# Altium PCB AudioBanger.PcbDoc
Units mil, origin at the board's own origin, x right, y up, seen from the top; angles counter-clockwise.
Board outline 1700 x 1700 mil, 2 copper layers (Top Layer, Bottom Layer), stack 62.8 mil thick; 22 components, 21 nets, 106 pads, 11 vias.
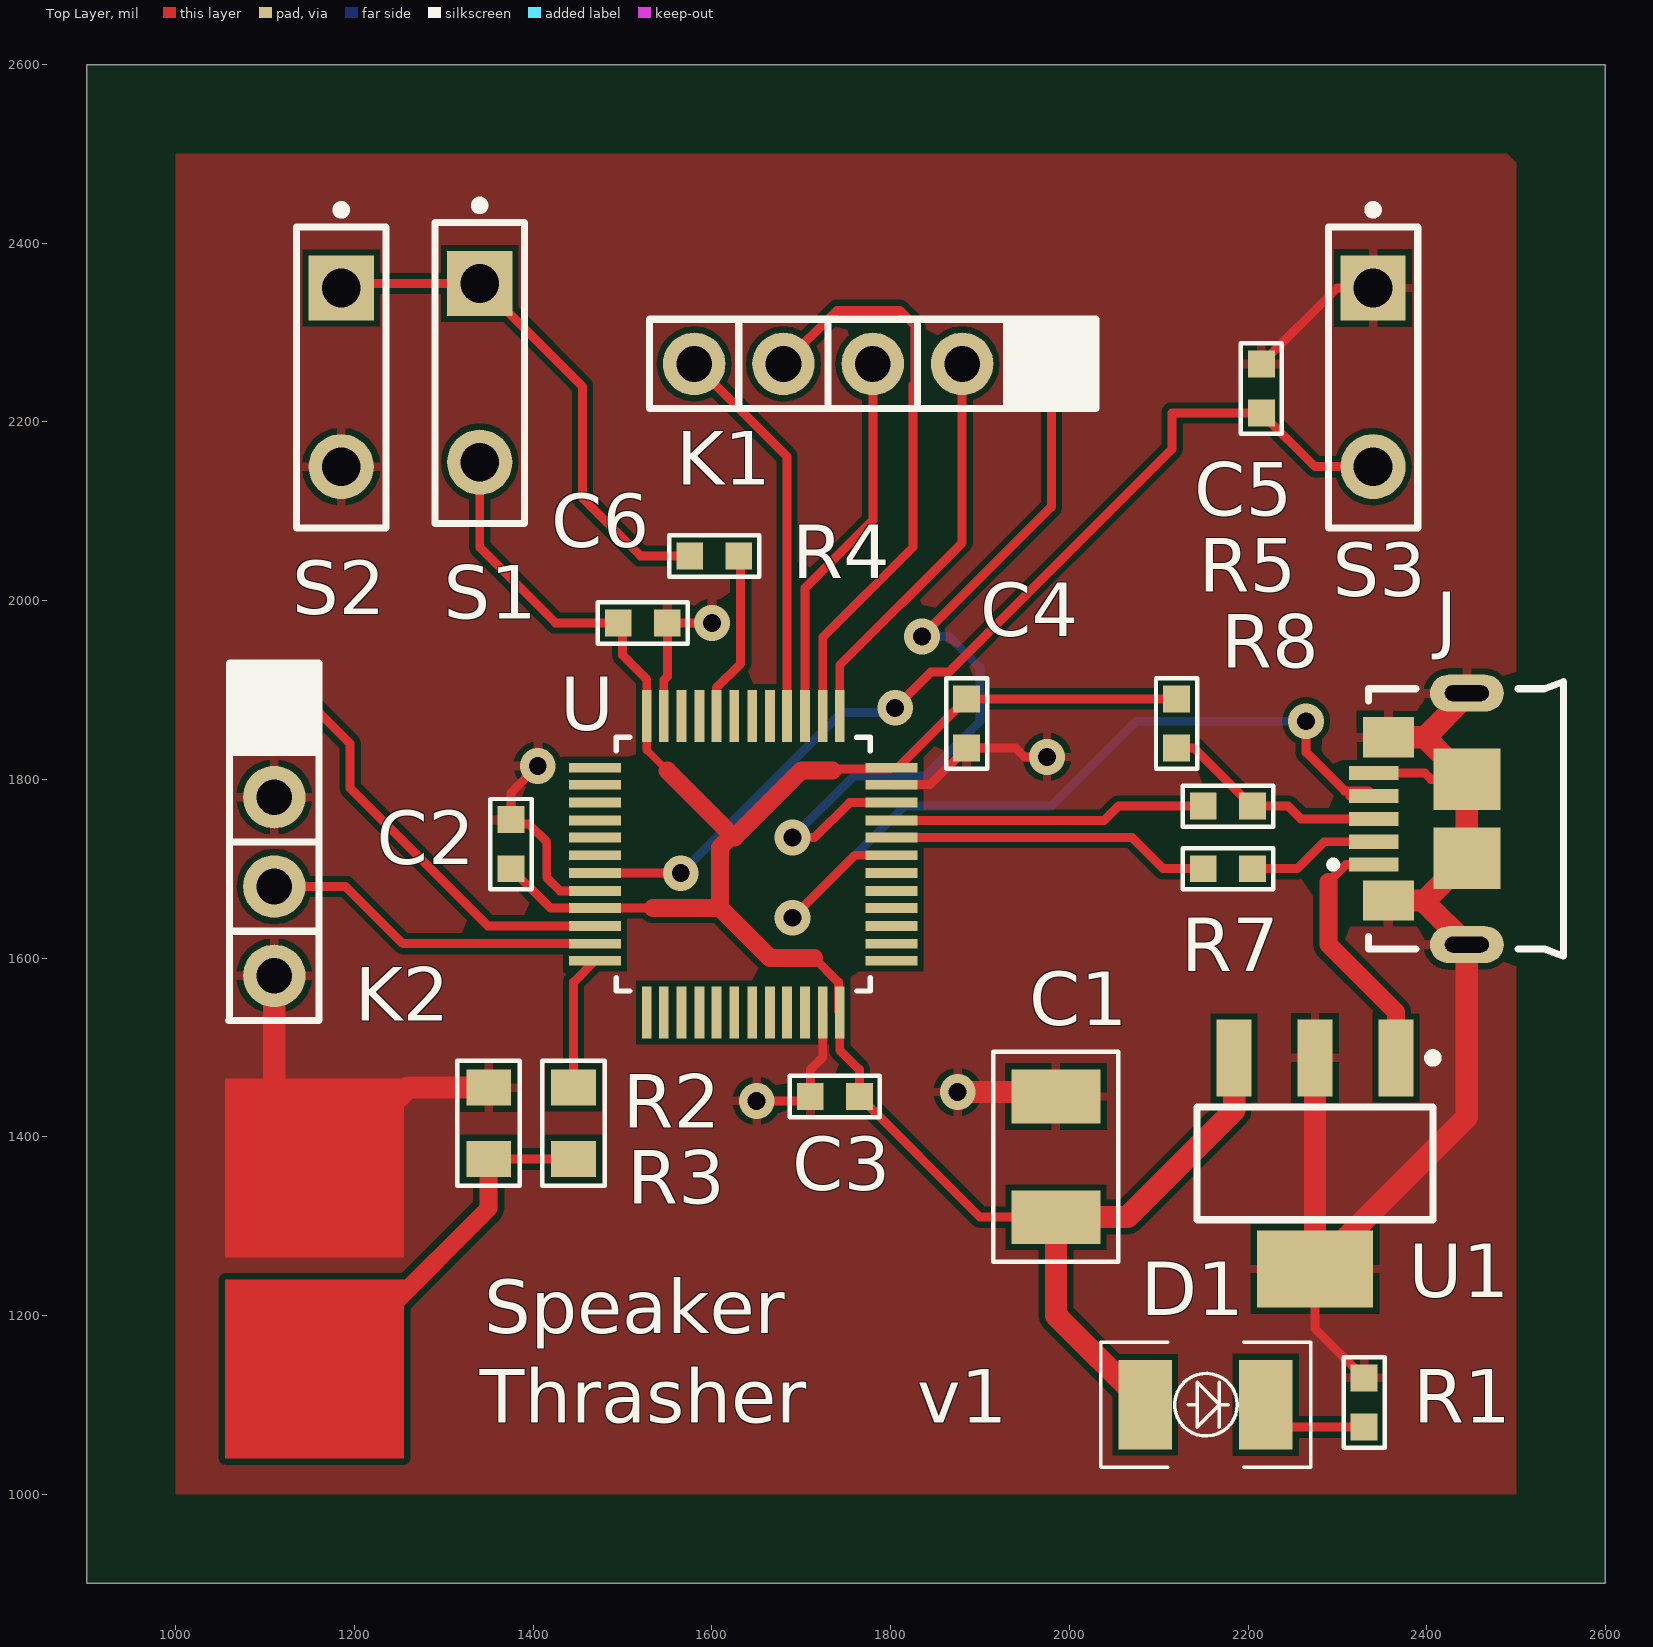
[diagram p0: Top Layer view]
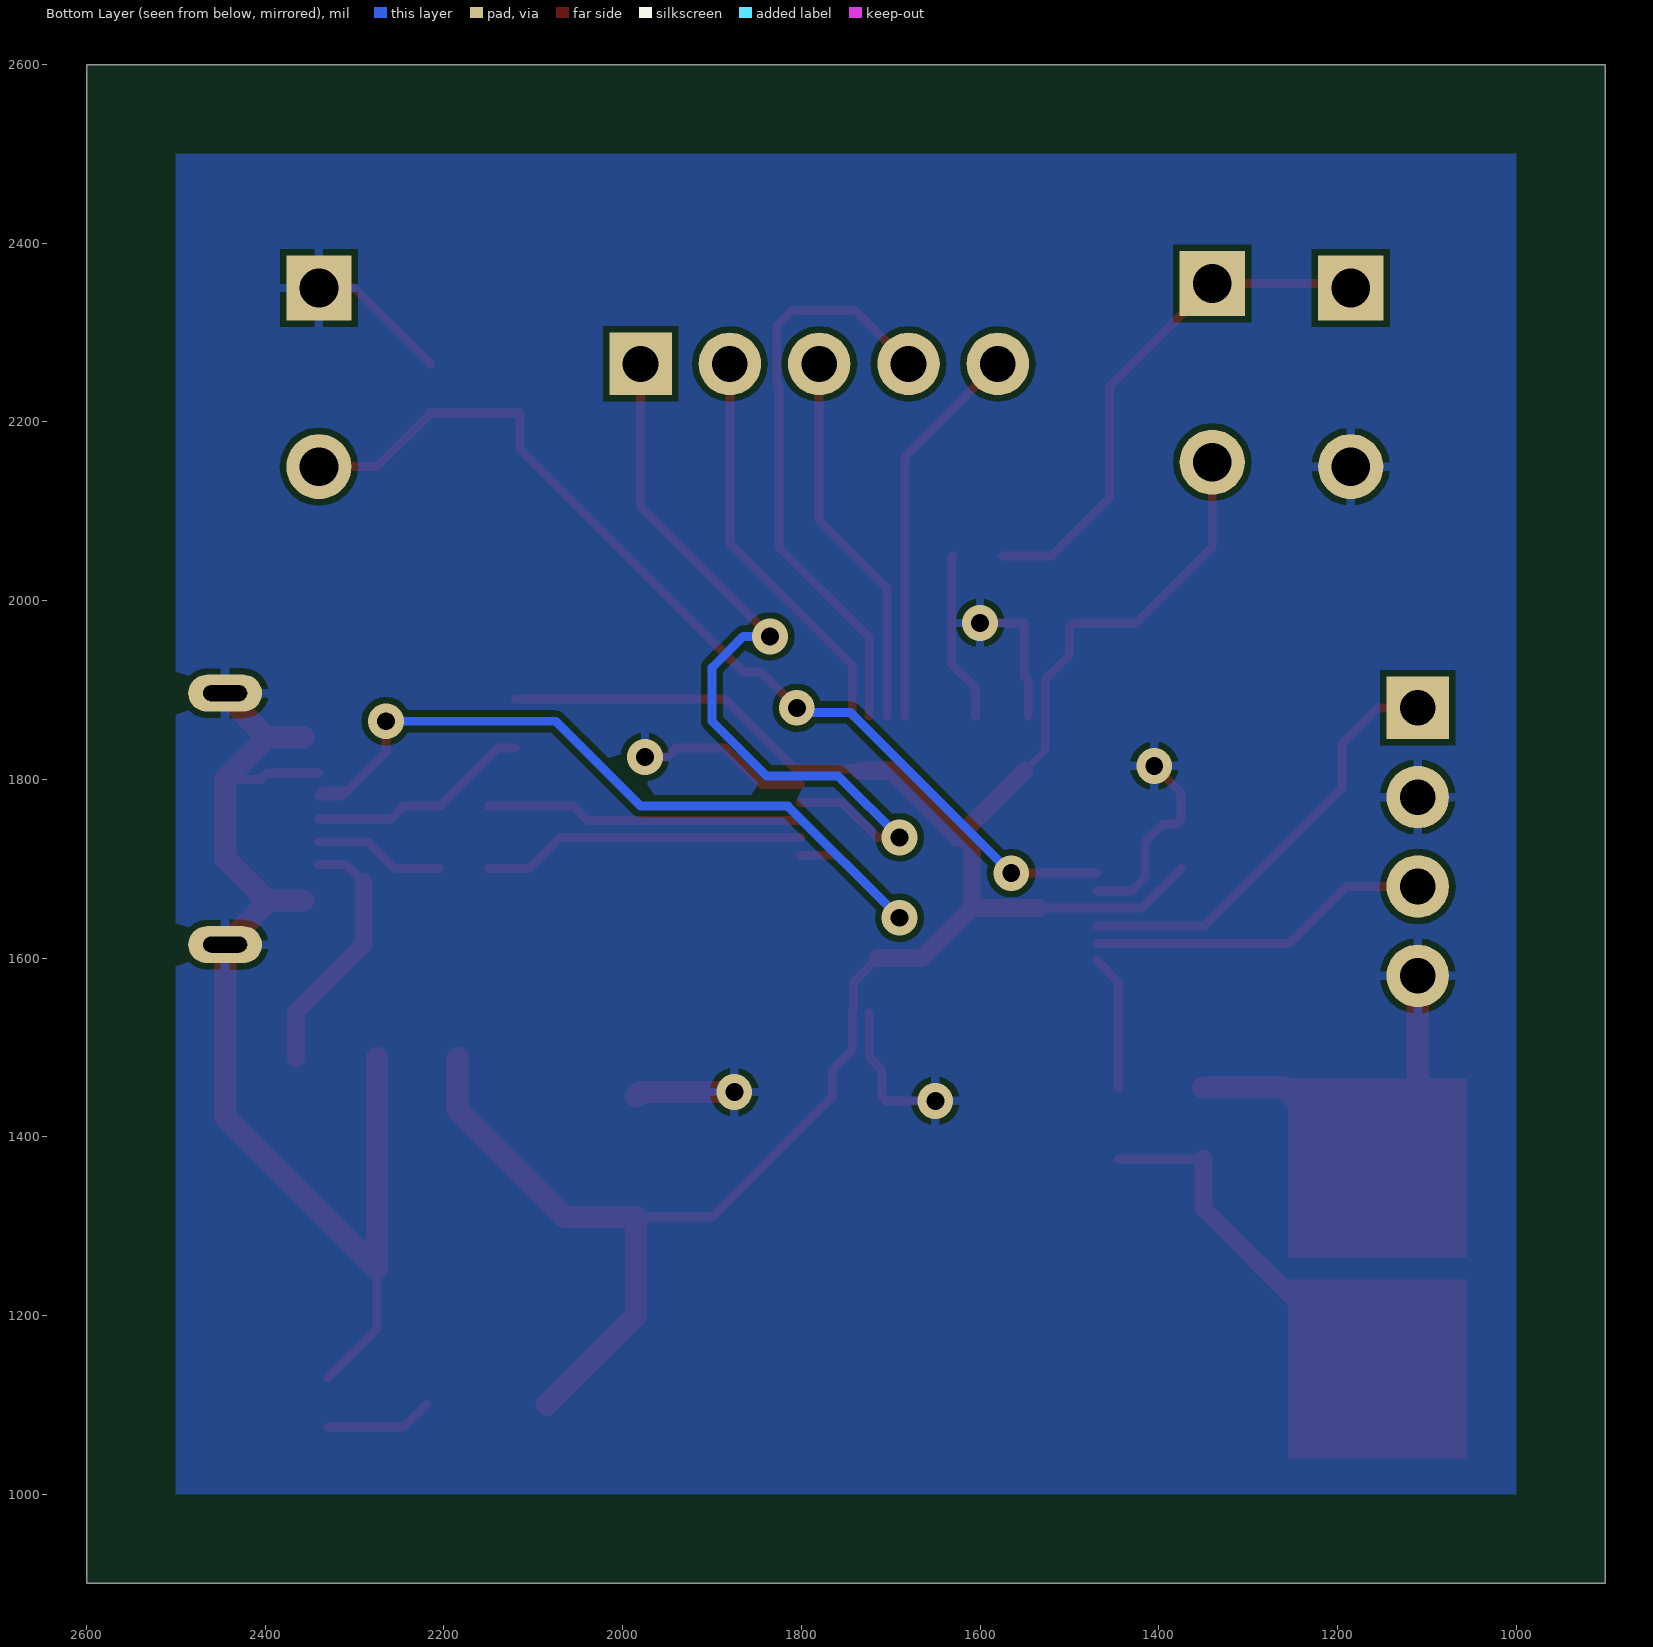
[diagram p1: Bottom Layer view, seen from below]

## Layer stack, top to bottom
Top Layer: signal copper 1.4
Dielectric: core 60, FR-4, Dk 4.8
Bottom Layer: signal copper 1.4

## Board outline
900,900 2600,900 2600,2600 900,2600 900,900

## Design rules (kind name [scope] priority, off if disabled: settings)
Clearance [All] p1: gap=7
ComponentClearance [All] p1: gap=5 collisioncheckmode=3 verticalgap=10 showdistances=FALSE
HoleSize [All] p1: absolutevalues=TRUE maxlimit=100 minlimit=10 maxpercent=80.000 minpercent=20.000
HoleToHoleClearance [All] p1: gap=5 allowstackedmicrovias=TRUE
MinimumSolderMaskSliver [All] p1: minsoldermaskwidth=1
PlaneClearance [All] p1: clearance=10
PolygonConnect [All] p1: connectstyle=Relief reliefconductorwidth=10 reliefentries=4 polygonreliefangle="90 Angle"
RoomDefinition Main [InComponentClass('Main')] p1 off: confinementstyle=ConfineIn formatcopy=TRUE lockcomponents=FALSE outline 1005,1010 2495,1010 2495,2495 1005,2495
RoutingVias [All] p1: holewidth=20 width=40 viastyle="Through Hole" minholewidth=20 minwidth=40 maxholewidth=50 maxwidth=80
SilkToSilkClearance [All] p1: silktosilkclearance=5
SilkscreenOverComponentPads [All] p1 off: minsilkscreentomaskgap=5
SolderMaskExpansion [All] p1: expansion=4
Width [All] p1: maxlimit=50 minlimit=7 preferedwidth=10
21 further rules are at their usual default settings.

## Classes and differential pairs
component class Main: J S1 S2 S3 U U1

## Components (designator, comment, footprint, x,y, rotation, side; value= is the part's Value field where it differs from the comment)
C1 "4u7" 1210C-GENERIC 1985,1310 r90 top
C2 "0603C" 0603C-GENERIC 1375,1700 r90 top
C3 "0603C" 0603C-GENERIC 1765,1445 r180 top
C4 "0603C" 0603C-GENERIC 1885,1890 r270 top
C5 "0603C" 0603C-GENERIC 2215,2210 r90 top
C6 "0603C" 0603C-GENERIC 1495,1975 r0 top
D1 "TOPLED-GREEN" TOPLED-GREEN 2085,1100 r0 top
J "USB3075-30-A" GCT_USB3075-30-A 2340.67,1704.53 r90 top
K1 "HEADER-1X5" HEADER-1X5 1980,2265 r270 top
K2 "HEADER-1X4" HEADER-1X4 1110,1880 r0 top
R1 "0603R-1K5" 0603R-1k5 2330,1075 r90 top
R2 "10R" 0805R-10 1445,1445 r270 top
R3 "10R" 0805R-10 1350,1445 r270 top
R4 "10K" 0603R-10K 1575,2050 r0 top
R5 "0603R-1K5" 0603R-1k5 2120,1890 r270 top
R7 "22R" 0603R-22 2205,1700 r180 top
R8 "22R" 0603R-22 2205,1770 r180 top
S1 "SW-PB" SPST-2 1340,2255 r270 top
S2 "SW-PB" SPST-2 1185,2250 r270 top
S3 "SW-PB" SPST-2 2340,2250 r270 top
U "STM32L151C6T6" QFP50P900X900X160-48N 1635,1705 r0 top
U1 "TC1262-3.3VDBTR" SOT-223-DB3_N 2275,1370 r270 top

## Footprints (in the part's own frame and the unit in brackets; to place one, negate y for a bottom-side part, rotate by r counter-clockwise, add the part's x,y. Pads: shape width x height; smd on the part's side, far side on the other; paste and mask are expansions set on the pad)
0603C-GENERIC [mil] "CAPACITOR 0603"
  rect 30x30 smd: 1(0,0) 2(55,0)
  silkscreen extent -23,-23 78,23, body extent -4,-15 59,15, height 19
0603R-1k5 [mil] "RESISTOR 0603"
  rect 30x30 smd: 1(0,0) 2(55,0)
  silkscreen extent -23,-23 78,23, body extent -4,-15 59,15, height 20
0603R-10K [mil] "RESISTOR 0603"
  rect 30x30 smd: 1(0,0) 2(55,0)
  silkscreen extent -23,-23 78,23, body extent -4,-15 59,15, height 20
0603R-22 [mil] "RESISTOR 0603"
  rect 30x30 smd: 1(0,0) 2(55,0)
  silkscreen extent -23,-23 78,23, body extent -4,-15 59,15, height 20
0805R-10 [mil] "RESISTOR 0805"
  rect 40x50 smd: 1(-10,0) 2(70,0)
  silkscreen extent -40,-35 100,35, body extent -11,-25 70,25, height 27
1210C-GENERIC [mil]
  rect 60x100 smd: 1(0,0) 2(135,0)
  silkscreen extent -50,-70 185,70, body extent -10,-50 145,50, height 46
GCT_USB3075-30-A [mm]
  rect 0.4x1.4 smd: 1(0,0) 2(0.65,0) 3(1.3,0) 4(1.95,0) 5(2.6,0)
  rect 1.15x1.45 smd: S1(-1.02,-0.42) S2(3.62,-0.42)
  rect 1.75x1.9 smd: S3(0.175,-2.65) S4(2.425,-2.65)
  oval 1.05x2.1 hole 0.45 slot 1.25 at 90 deg: S5(-2.275,-2.65) S6(4.875,-2.65)
  silkscreen extent -2.6,-5.4 5.2,1.25
HEADER-1X4 [mil]
  rect 70x70 hole 40: 1(0,0)
  round 70 hole 40: 2(0,-100) 3(0,-200) 4(0,-300)
  silkscreen extent -51,-350 50,50, body extent -50,-350 50,50, height 470
HEADER-1X5 [mil]
  rect 70x70 hole 40: 1(0,0)
  round 70 hole 40: 2(0,-100) 3(0,-200) 4(0,-300) 5(0,-400)
  silkscreen extent -50,-450 50,50, body extent -50,-450 50,50, height 470
QFP50P900X900X160-48N [mil]
  rect 58x11 smd: 1(-166,108) 2(-166,89) 3(-166,69) 4(-166,49) 5(-166,30) 6(-166,10) 7(-166,-10) 8(-166,-30) 9(-166,-49) 10(-166,-69) 11(-166,-89) 12(-166,-108) 25(166,-108) 26(166,-89) 27(166,-69) 28(166,-49) 29(166,-30) 30(166,-10) 31(166,10) 32(166,30) 33(166,49) 34(166,69) 35(166,89) 36(166,108)
  rect 11x58 smd: 13(-108,-166) 14(-89,-166) 15(-69,-166) 16(-49,-166) 17(-30,-166) 18(-10,-166) 19(10,-166) 20(30,-166) 21(49,-166) 22(69,-166) 23(89,-166) 24(108,-166) 37(108,166) 38(89,166) 39(69,166) 40(49,166) 41(30,166) 42(10,166) 43(-10,166) 44(-30,166) 45(-49,166) 46(-69,166) 47(-89,166) 48(-108,166)
  silkscreen extent -142,-142 142,142
SOT-223-DB3_N [mm] "SOT223, 4-Leads, Body 6.5x3.5mm, Pitch 2.3mm, Lead Span 7mm, IPC Medium Density"
  rect 2.2x1 smd: 1(-3,2.3) 2(-3,0) 3(-3,-2.3)
  rect 2.2x3.3 smd: 4(3,0)
  silkscreen extent -3.12,-3.35 1.6,3.48, body extent -1.85,-3.35 1.85,3.35, height 1.8
SPST-2 [mm] "Switch; 2 Leads"
  rect 1.85x1.85 hole 1.1: 1(-2.54,0)
  round 1.85 hole 1.1: 2(2.54,0)
  silkscreen extent -4.89,-1.27 4.28,1.27
TOPLED-GREEN [mil]
  rect 60x100 smd: A(0,0) K(135,0)
  silkscreen extent -50,-70 185,70, body extent -20,-60 154,60, height 75

## Part data
C1: library part 1210C-4U7-16V-X7R-TAY, "GENERIC CAPACITOR NON POLARISED 1210"
C2 C3 C4 C5 C6: library part 0603C-GENERIC, "CAPACITOR 0603 CERAMIC GENERIC"
J: "USB - micro B USB 2.0 Receptacle Connector 5 Position Surface Mount, Right Angle; Through Hole"
K1: "PINHEADER 1X5"
R1 R5: "GENERIC RESISTOR 0603"
R2 R3: library part 0805R-10, "RESISTOR 0805 1/4 WATT THIN FILM"
R4: library part 0603R-10K, "GENERIC RESISTOR 0603"
R7 R8: library part 0603R-22R, "GENERIC RESISTOR 0603"
S1 S2 S3: "Switch"
U: "ARM® Cortex®-M3 STM32L1 Microcontroller IC 32-Bit 32MHz 32KB _32K x 8_ FLASH 48-LQFP _7x7_"
U1: "500mA Fixed Output CMOS LDO, 3-Pin SOT-223, Extended Temperature, Tape and Reel"

## Via types
v1: diameter 40, hole 20, Top Layer to Bottom Layer, 11 vias

## Nets (pads, with @x,y where several pads share a name; then routed paths per layer and width w, separated by ;. In a path a pad name is that pad's centre, name@x,y a point inside that pad or via, vN(x,y) a via of type N, cw(c..) or ccw(c..) an arc to the next point about the centre after c; other vN are vias at no path point)
3V3: C1.1 C2.1 C3.1 C4.1 C6.1 D1.A R5.1 S1.2 U1.3 U.9 U.24 U.36 U.48 | length 2622.1
  Top Layer w8: 1527,1833 1550,1810
  Top Layer w10: S1.2 1340,2060 1425,1975 C6.1 1500,1970 1500,1939 1527,1912 U.48 1527,1833 ; C2.1 1419,1656 U.9 1534,1656 ; 1625,1735 1630,1735 ; 1714.47,1600 1741.5,1572.97 1741.5,1540.5 U.24 1743,1497 1765,1475 C3.1 1900,1310 C1.1 ; 1735,1810 1736.5,1811.5 1799.5,1811.5 U.36 1808,1813 C4.1 R5.1
  Top Layer w20: 1534,1656 1609,1656 ; 1550,1810 1622.5,1737.5 ; 1714.47,1600 1665,1600 1609,1656 ; 1735,1810 1700,1810 1625,1735 1622.5,1737.5 ; 1609,1656 1609,1724 1622.5,1737.5
  Top Layer w25: D1.A 1985,1200 C1.1 2065,1310 2184.45,1429.45 U1.3
DN: J.2 R7.1 | length 148.1
  Top Layer w10: R7.1 2255,1700 2285.12,1730.12 J.2
DP: J.3 R5.2 R8.1 | length 253.5
  Top Layer w10: R5.2 2140,1835 R8.1 2245,1770 2259.29,1755.71 J.3
GND: C1.2 C2.2 C3.2 C4.2 C5.2 C6.2 J.5 J.S1 J.S2 J.S3 J.S4 J.S5 J.S6 K2.2 K2.4 R1.2 R3.1 S2.2 S3.1 U1.2 U1.4 U.8 U.23 U.35 U.47 | length 2645.9
  Top Layer w10: v1(1405,1815) 1375,1785 C2.2 1380,1750 1395,1750 1415,1730 1415,1690 1430,1675 U.8 ; U.47 1546,1911 1550,1915 C6.2 v1(1600,1975) ; v1(1650,1440) 1705,1440 C3.2 1710,1475 1724,1489 U.23 ; U.35 1844,1794 C4.2 1940,1835 1950,1825 v1(1975,1825) ; C5.2 2300,2350 S3.1 ; U1.4 2275,1185 R1.2 ; J.5 2398.11,1806.89 2405,1800 J.S4
  Top Layer w25: 1110,1445 K2.4 ; 1225,1420 1260,1455 R3.1 ; v1(1875,1450) 1980,1450 C1.2 ; U1.2 U1.4 2445,1421.89 J.S5 2395.59,1664.37 ; J.S1 2395.59,1664.37 ; J.S2 2397.95,1847.05 ; J.S6 2445,1894.09 2397.95,1847.05 ; 2395.59,1664.37 2397.95,1664.37 J.S3 J.S4 2397.95,1847.05
ID: J.4 U.31 | length 963.7
  Top Layer w10: v1(1690,1645) 1760,1715 U.31 ; v1(2265,1865) 2265,1830.16 2308.14,1787.02 2334.95,1787.02 J.4 J.4@2313.86,1781.3
  Bottom Layer w10: v1(1690,1645) 1815,1770 1980,1770 2075,1865 v1(2265,1865)
JNTRST: K1.5 U.40 | length 437.1
  Top Layer w10: K1.5 1684,2161 U.40
JTCK: K1.2 U.37 | length 450.7
  Top Layer w10: U.37 1743,1928 1880,2065 K1.2
JTDI: K1.4 U.38 | length 658.6
  Top Layer w10: K1.4 1740,2325 1810,2325 1827,2308 1827,2243.53 1825,2241.53 1825,2060 1724,1959 U.38
JTDO: K1.3 U.39 | length 425.5
  Top Layer w10: U.39 1704,2014 1780,2090 K1.3
JTMS: K1.1 U.34 | length 895.6
  Top Layer w10: v1(1690,1735) 1715,1735 1754,1774 U.34 ; v1(1835,1960) 1980,2105 K1.1
  Bottom Layer w10: v1(1690,1735) 1758.7,1803.7 1838.7,1803.7 1900,1865 1900,1925 1865,1960 v1(1835,1960)
NetC5_1: C5.1 S3.2 U.7 | length 1120.5
  Top Layer w10: U.7 v1(1565,1695) ; v1(1805,1880) 1845,1920 1865,1920 2115,2170 2115,2210 C5.1 2275,2150 S3.2
  Bottom Layer w10: v1(1565,1695) 1745,1875 v1@1795,1875
NetD1_K: D1.K R1.1 | length 120.4
  Top Layer w10: D1.K 2245,1075 R1.1
NetJ_1: J.1 U1.1 | length 286.9
  Top Layer w10: 2290,1685 2309.53,1704.53 J.1
  Top Layer w20: 2290,1685 2290,1615 2365.55,1539.45 U1.1
NetR4_1: R4.1 S1.1 S2.1 | length 591.6
  Top Layer w10: S2.1 1190,2355 S1.1 1455,2240 1455,2115 1520,2050 R4.1
NetR4_2: R4.2 U.44 | length 191
  Top Layer w10: U.44 1605,1902.47 1632,1929.47 1632,2048 R4.2
NetR7_2: R7.2 U.32 | length 363.5
  Top Layer w10: U.32 2070,1735 2105,1700 R7.2
NetR8_2: R8.2 U.33 | length 355.6
  Top Layer w10: U.33 2039,1754 2055,1770 R8.2
PA0: K2.1 U.10 | length 489.4
  Top Layer w10: K2.1 1155,1880 1195,1840 1195,1790 1349,1636 U.10
PA1: K2.3 U.11 | length 385.5
  Top Layer w10: K2.3 1190,1680 1254,1616 U.11
PA2: R2.1 U.12 | length 151.9
  Top Layer w10: R2.1 1445,1573 U.12
SPKR: R2.2 R3.2 | length 322.6
  Top Layer w10: R3.2 R2.2
  Top Layer w20: 1235,1215 1235,1205 1350,1320 R3.2
pads on no net: U.1 U.2 U.3 U.4 U.5 U.6 U.13 U.14 U.15 U.16 U.17 U.18 U.19 U.20 U.21 U.22 U.25 U.26 U.27 U.28 U.29 U.30 U.41 U.42 U.43 U.45 U.46

## Polygon pours and split planes (outlines as drawn)
GND on Top Layer "GND" (solid, remove dead copper, pour order 6): 1000,1000 2500,1000 2500,2490 2495,2495 2490,2500 1000,2500 1000,1000
GND on Bottom Layer "GND" (solid, remove dead copper, pour order 8): 1000,1000 2500,1000 2500,2500 1000,2500 1000,1000

## Other copper
Top Layer:
  rectangle net SPKR: 1055,1040 1255,1240
  rectangle net GND: 1055,1265 1255,1465

## Silkscreen, mask and mechanical layers (free items; w line width, h text height)
Top Overlay:
  text "Speaker" at 1345,1180 h60
  text "Thrasher" at 1340,1080 h60
  text "v1" at 1830,1080 h60
Top Solder:
  rectangle: 1055,1260 1255,1465
  rectangle: 1055,1040 1255,1240
Mechanical 1:
  lines w10: 900,900 2600,900 2600,2600 900,2600 900,900 ; 2421,1617 cw(c2427,1617) 2427,1623 2460,1623 cw(c2461.5,1613.5) 2471,1615 cw(c2462,1615) 2462,1606 2426,1606 cw(c2429,1614) 2421,1617 ; 2421,1899 ccw(c2429,1896) 2426,1888 2462,1888 ccw(c2462,1897) 2471,1897 ccw(c2461.5,1895.5) 2460,1905 2427,1905 ccw(c2427,1899) 2421,1899

## Text inside footprints (layer, text, board x,y; h text height)
J: Mechanical 13 "PCB EDGE" at 2500.31,1929.55 h16.06 r90